# EAGLE board akabeacon_circle_ble113 (EAGLE 7.3.2)
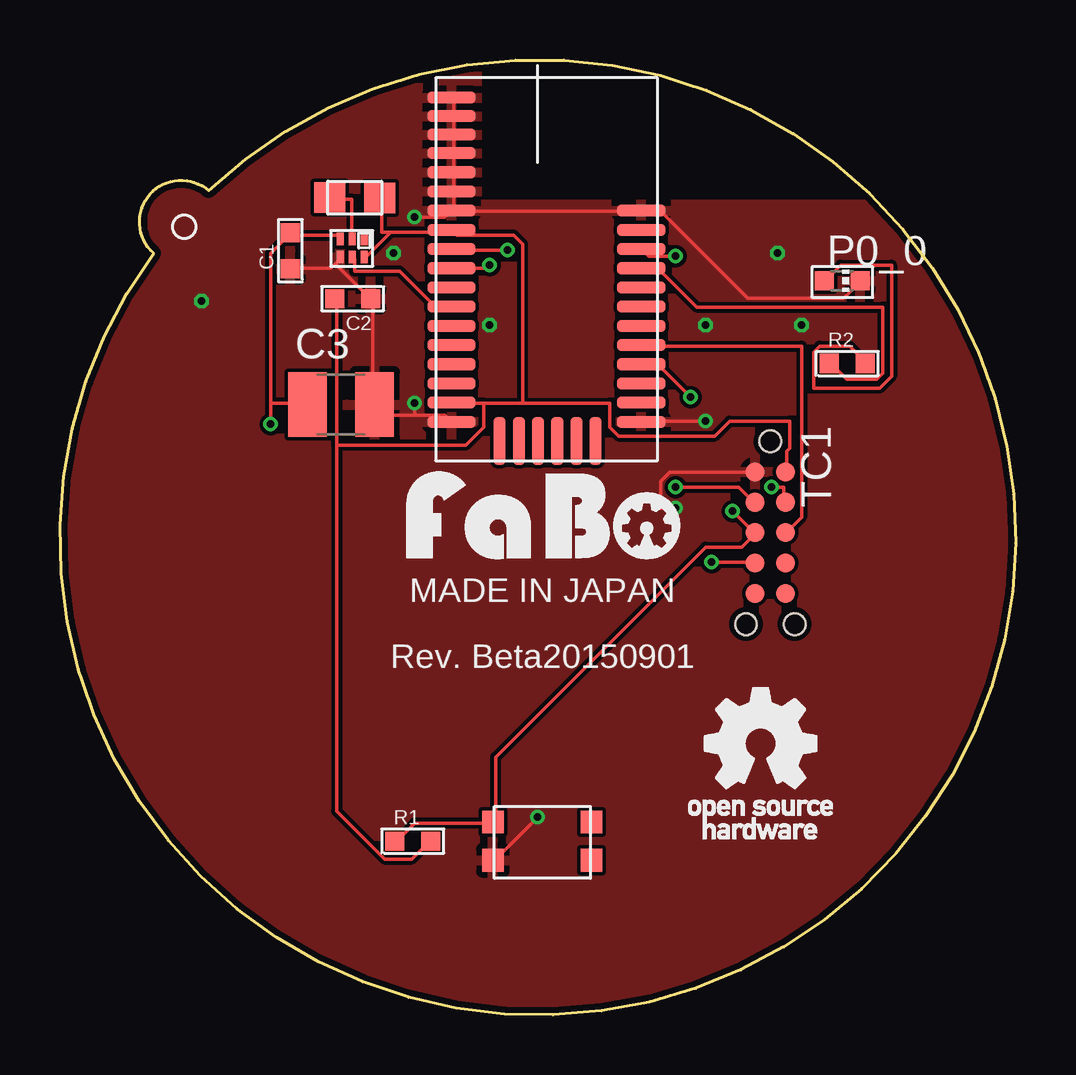
[diagram p0: board, top side]
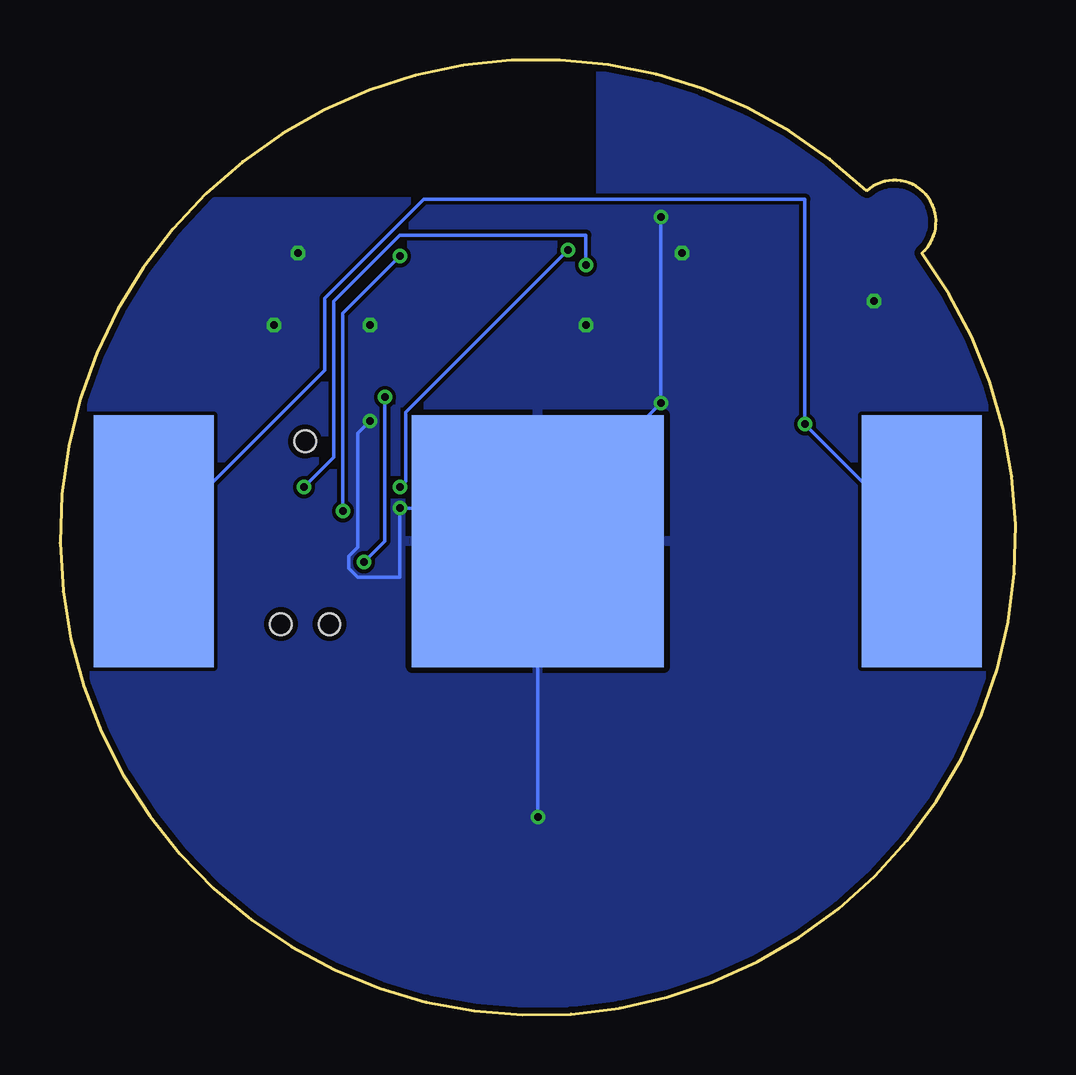
[diagram p1: board, bottom side, seen from below]

Size 39.81 x 39.79 mm. Coordinates in mm from the lower left corner, seen from the top.
Copper layers (1*16): Top 0.035mm / dielectric 1.5mm / Bottom 0.035mm
Design rules "SeeedStudio_2layer_DRU_no_angle_20140221": minimum track width 6mil, minimum drill 12mil, track to track 6mil, track to pad 6mil, pad to pad 6mil, via to via 6mil, smd to smd 0mil, copper to edge 10mil, drill to drill 10mil, minimum pad ring 10mil, minimum via ring 6mil, stop-mask expansion 2mil, vias tented up to drill 100mil, thermal gap 10mil
tRestrict: area 17.6,34 to 35.8,41
bRestrict: area 17.5,34.1 to 36,41.1

## Footprints (pad centres in the part's own frame; a part is rotated, then mirrored left to right if it is on the bottom)
0603 = smd 0.8 x 0.8: 1 -0.75,0; 2 0.75,0
C3225 = smd 1.6 x 2.7: 1 -1.4,0; 2 1.4,0
INDUCTOR-0805 = smd 1.3 x 1.27: P$1 -1.04,0.02; P$2 1.04,0.01
CHIP-LED0603 = smd 0.8 x 0.8: A 0,-0.75; C 0,0.75
TC2050-IDC-NL = smd 0.787 x 0.787: 1 -2.54,-0.635; 2 -2.54,0.635; 3 -1.27,-0.635; 4 -1.27,0.635; 5 0,-0.635; 6 0,0.635; 7 1.27,-0.635; 8 1.27,0.635; 9 2.54,-0.635; 10 2.54,0.635 | hole 0.889: -3.81,0; 3.81,-1.016; 3.81,1.016
TI-TPS62730 = smd 0.3 x 0.52: 1 0.48,0.25; 2 -0.02,0.25; 3 -0.52,0.25; 4 -0.52,-0.5; 5 -0.02,-0.5; 6 0.48,-0.5
CIRCLE-TYE1-TC2030 = smd 10.5 x 10.5 bottom: GND 0,0 | smd 5 x 10.5 bottom: PLUS1 -16,0; PLUS2 16,0
BLE113 = smd 2 x 0.5: 1 -5.08,5.08; 2 -5.08,4.31; 3 -5.08,3.54; 4 -5.08,2.77; 5 -5.08,1.97; 6 -5.08,1.17; 7 -5.08,0.37; 8 -5.08,-0.43; 9 -5.08,-1.23; 10 -5.08,-2.03; 11 -5.08,-2.83; 12 -5.08,-3.63; 13 -5.08,-4.43; 14 -5.08,-5.23; 15 -5.08,-6.03; 16 -5.08,-6.83; 17 -5.08,-7.63; 18 -5.08,-8.43; 25 2.82,-8.43; 26 2.82,-7.63; 27 2.82,-6.83; 28 2.82,-6.03; 29 2.82,-5.23; 30 2.82,-4.43; 31 2.82,-3.63; 32 2.82,-2.83; 33 2.82,-2.03; 34 2.82,-1.23; 35 2.82,-0.43; 36 2.82,0.37 | smd 0.5 x 2: 19 -3.08,-9.23; 20 -2.28,-9.23; 21 -1.48,-9.23; 22 -0.68,-9.23; 23 0.12,-9.23; 24 0.92,-9.23
SWITCH-4P(KMR2) = smd 0.9 x 0.95: 1 -1,0; 2 3.1,0; 3 -1,-1.6; 4 3.1,-1.6

## Placement (x,y rotation side)
C1  CAPACITOR0603  [0603]  9.6,31.84 90 top
C2  CAPACITOR0603  [0603]  12.2,29.84 180 top
C3  [C3225]  11.71,25.43 0 top
I1  INDUCTOR-0805  [INDUCTOR-0805]  12.28,34.03 0 top
P0_0  [CHIP-LED0603]  32.59,30.59 270 top
R1  10K  [0603]  14.7,7.24 0 top
R2  180  [0603]  32.8,27.14 0 top
TC1  TC2050-IDC  [TC2050-IDC-NL]  29.6,20.09 270 top
TPS1  TI-TPS62730  [TI-TPS62730]  12.2,32.07 0 top
U$1  CIRCLE-TYPE1  [CIRCLE-TYE1-TC2030]  19.9,19.74 0 top
U$2  [LOGO_FABO_M]  20.15,18.99 0 top
U$4  BLE113  [BLE113]  21.4,33.14 0 top
U$5  SWICTH-4P(KMR2)  [SWITCH-4P(KMR2)]  19.04,8.04 0 top
U$7  [LOGO_OSHW_T_M]  29.2,11.29 0 top

## Library data of the parts
C1 C2 = GClue-Capacitor
C3 = rcl
I1 = gclueParts
P0_0 = led
R1 R2 = GClue-Resistors
TC1 = TagConnect
TPS1 = gclueSupply
U$1 = GClue-Beacon
U$2 = FaBo
U$4 U$7 = gclue
U$5 = gclue-test

## Nets
3.3V: C2.2 I1.P$2 R1.2 TC1.2 TPS1.6 U$4.8 U$4.17
DEBUG_CLOCK: TC1.4 U$4.10
DEBUG_DATA: TC1.3 U$4.9
GND: C1.1 C2.1 C3.2 P0_0.C TC1.1 TPS1.4 U$1.GND U$4.1 U$4.2 U$4.3 U$4.4 U$4.5 U$4.6 U$4.7 U$4.18 U$4.25 U$4.36 U$5.3
N$1: C1.2 C3.1 TPS1.3 U$1.PLUS1 U$1.PLUS2
N$5: I1.P$1 TPS1.2
P0_0: R2.1 U$4.33
P0_1: U$4.32
P0_2: U$4.31
P0_3: U$4.30
P0_4: TC1.6 U$4.29
P0_5: TC1.7 U$4.28
P0_6: U$4.27
P0_7: U$4.26
P1_0: U$4.24
P1_1: U$4.23
P1_2: U$4.22
P1_3: U$4.21
P1_4: U$4.20
P1_5: U$4.19
P1_6: U$4.13
P1_7: TPS1.5 U$4.12
P2_0: U$4.11
R2: P0_0.A R2.2
RESET: R1.1 TC1.5 U$4.34 U$5.1

## Tracks (layer width: path | path; a pad name or v marks a point on that pad's centre or on a via)
3.3V
  Top 0.152: 11.52,23.74 11.52,29.74 C2.2 | 11.52,23.74 11.52,8.49 13.52,6.49 14.65,6.49 15.4,7.24 R1.2 | 13.77,32.62 12.77,31.62 TPS1.6 | 13.77,32.62 16.27,32.62 U$4.8 16.4,32.62 16.52,32.49 18.9,32.49 19.27,32.12 19.27,25.49 | 13.77,32.62 13.4,32.62 13.4,33.99 I1.P$2 | 17.65,25.49 16.4,25.49 U$4.17 | 17.65,25.49 19.27,25.49 | 19.27,25.49 22.9,25.49 22.9,24.49 23.27,24.12 27.27,24.12 27.9,24.74 30.4,24.74 30.4,23.62 30.27,23.49 30.27,22.74 TC1.2 | 11.52,23.74 16.9,23.74 17.65,24.49 17.65,25.49
DEBUG_CLOCK  (via drill 0.3)
  Top 0.152: v29.65,21.99 30.15,21.99 30.15,21.37 TC1.4 | v17.9,31.24 17.77,31.12 16.4,31.12 U$4.10
  Bottom 0.152: v29.65,21.99 28.4,23.24 28.4,29.74 25.65,32.49 17.9,32.49 v17.9,31.24
DEBUG_DATA  (via drill 0.3)
  Top 0.152: v25.65,21.99 28.27,21.99 28.9,21.37 TC1.3 | v18.65,31.87 16.4,31.87 U$4.9
  Bottom 0.152: v25.65,21.99 25.4,22.24 25.4,25.12 v18.65,31.87
GND  (via drill 0.3)
  Top 0.152: U$4.7 16.4,33.62 16.4,34.24 U$4.6 16.4,34.37 16.4,34.99 U$4.5 16.4,35.12 16.4,35.87 U$4.4 16.4,35.99 16.4,36.62 U$4.3 16.4,36.74 16.4,37.37 U$4.2 16.4,37.49 16.4,38.12 U$4.1 | P0_0.C 33.27,30.49 32.65,29.87 28.65,29.87 25.02,33.49 24.27,33.49 U$4.36 24.15,33.49 16.4,33.49 U$4.7 | 11.4,31.24 11.27,31.12 9.65,31.12 C1.1 | 11.4,31.24 11.65,31.49 TPS1.4 | 11.4,31.24 11.52,31.24 12.9,29.87 C2.1 13.02,29.74 13.02,25.49 C3.2 13.15,25.37 13.52,24.99 14.77,24.99 | 14.77,24.99 16.02,24.99 16.27,24.74 U$4.18 | v25.65,21.12 25.02,21.12 25.02,22.24 25.4,22.62 28.9,22.62 TC1.1 | v19.9,8.24 18.15,6.49 U$5.3 | v26.9,24.74 24.27,24.74 U$4.25 | v14.77,25.49 14.77,24.99 | v14.77,33.24 16.02,33.24 16.27,33.49 U$4.7
  Bottom 0.152: 19.9,20.37 19.9,21.12 v25.65,21.12 25.65,18.24 27.4,18.24 27.77,18.62 27.77,19.12 27.4,19.49 27.4,24.24 v26.9,24.74 | v19.9,8.24 U$1.GND 19.9,20.37 | 19.9,20.37 v14.77,25.49 v14.77,33.24
  other vias: 17.9,28.74 26.9,28.74 29.9,31.74 5.9,29.74 30.9,28.74 13.9,31.74
  pour Top: -4.1,-0.26 40.9,-0.26 40.9,40.74 -4.1,40.74
  pour Bottom: -4.1,-0.26 40.9,-0.26 40.9,40.74 -4.1,40.74
N$1  (via drill 0.3)
  Top 0.152: TPS1.3 11.65,32.37 11.52,32.49 9.65,32.49 C1.2 9.52,32.49 8.77,31.74 8.77,25.49 | 8.77,25.49 10.27,25.49 C3.1 | v8.77,24.62 8.77,25.49
  Bottom 0.152: U$1.PLUS1 v8.77,24.62 8.77,33.99 24.65,33.99 28.77,29.87 28.77,26.87 U$1.PLUS2
N$5
  Top 0.152: TPS1.2 12.15,32.37 12.15,33.99 11.27,33.99 I1.P$1
P0_0
  Top 0.152: R2.1 32.15,27.12 32.77,26.49 34.02,26.49 34.27,26.74 34.27,29.49 26.52,29.49 25.02,30.99 24.27,30.99 U$4.33
P0_4
  Top 0.152: TC1.6 30.27,20.12 30.9,20.74 30.9,27.87 24.27,27.87 U$4.29
P0_5  (via drill 0.3)
  Top 0.152: v27.15,18.87 28.9,18.87 TC1.7 | v26.27,25.74 25.02,26.99 24.27,26.99 U$4.28
  Bottom 0.152: v27.15,18.87 26.27,19.74 v26.27,25.74
P1_7
  Top 0.152: TPS1.5 12.27,31.49 12.27,30.99 14.15,30.99 15.52,29.62 16.27,29.62 U$4.12
R2
  Top 0.152: R2.2 33.52,27.24 32.9,27.87 31.65,27.87 31.4,27.62 31.4,26.12 34.15,26.12 34.65,26.62 34.65,31.24 32.52,31.24 31.9,30.62 P0_0.A
RESET  (via drill 0.3)
  Top 0.152: R1.1 14.02,7.24 14.77,7.99 18.02,7.99 U$5.1 18.15,8.12 18.15,10.74 26.9,19.49 28.4,19.49 28.9,19.99 TC1.5 28.9,20.12 v28.02,20.99 | v25.65,31.62 24.52,31.62 24.27,31.87 U$4.34
  Bottom 0.152: v25.65,31.62 28.02,29.24 v28.02,20.99

## Text on the board
tPlace: MADE IN JAPAN | Rev. Beta20150901